# Altium PCB pcb1.PcbDoc
Units mm, origin at the board's own origin, x right, y up, seen from the top; angles counter-clockwise.
Board outline 100 x 100 mm, 2 copper layers (Top Layer, Bottom Layer); 18 components, 17 nets, 56 pads, 2 vias.
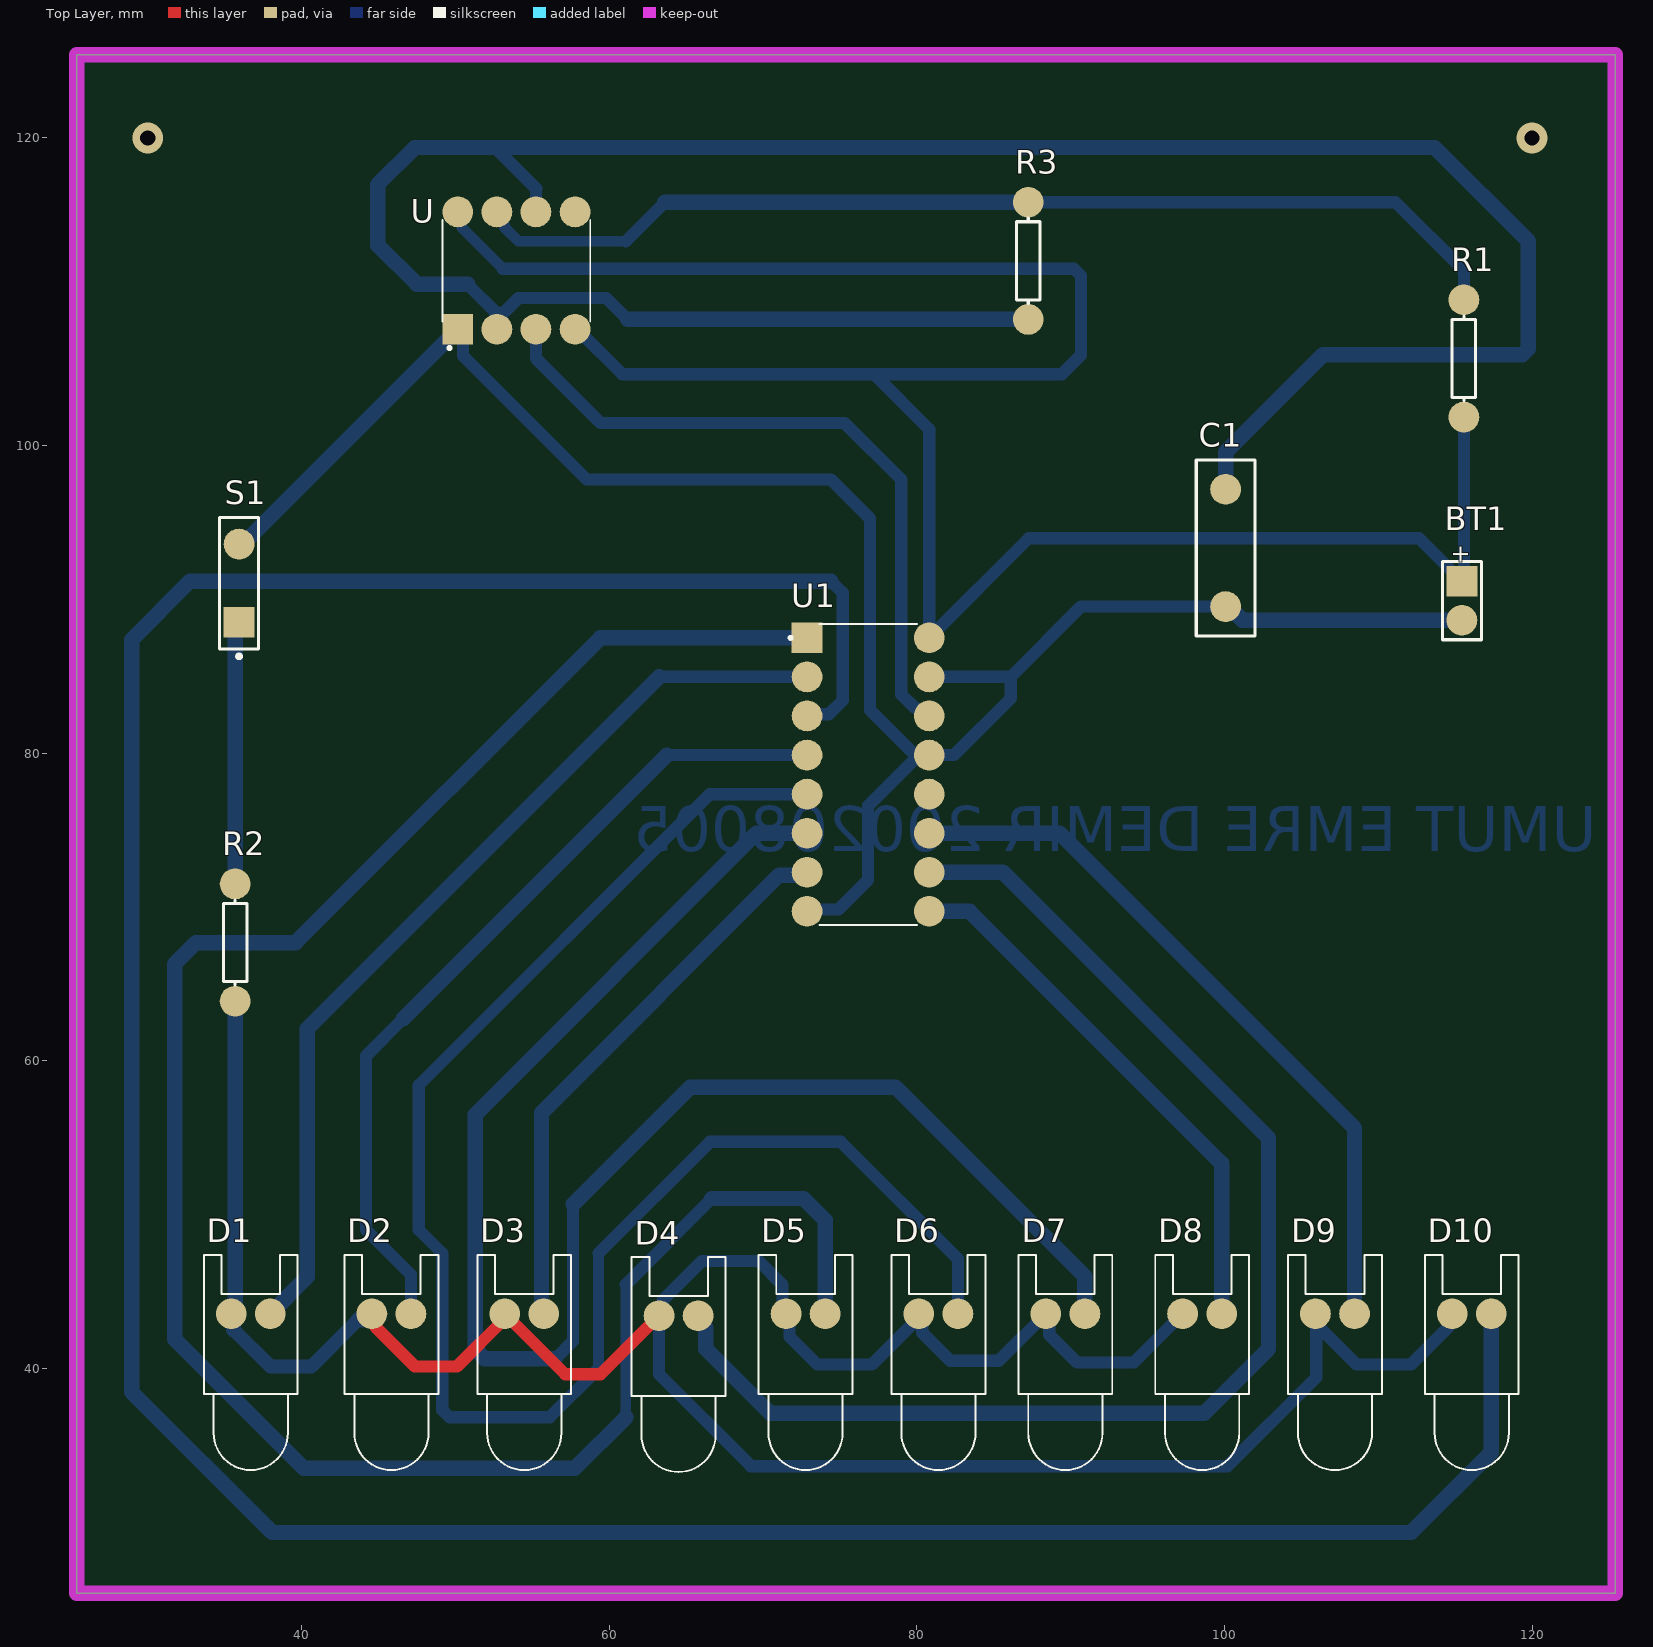
[diagram p0: Top Layer view]
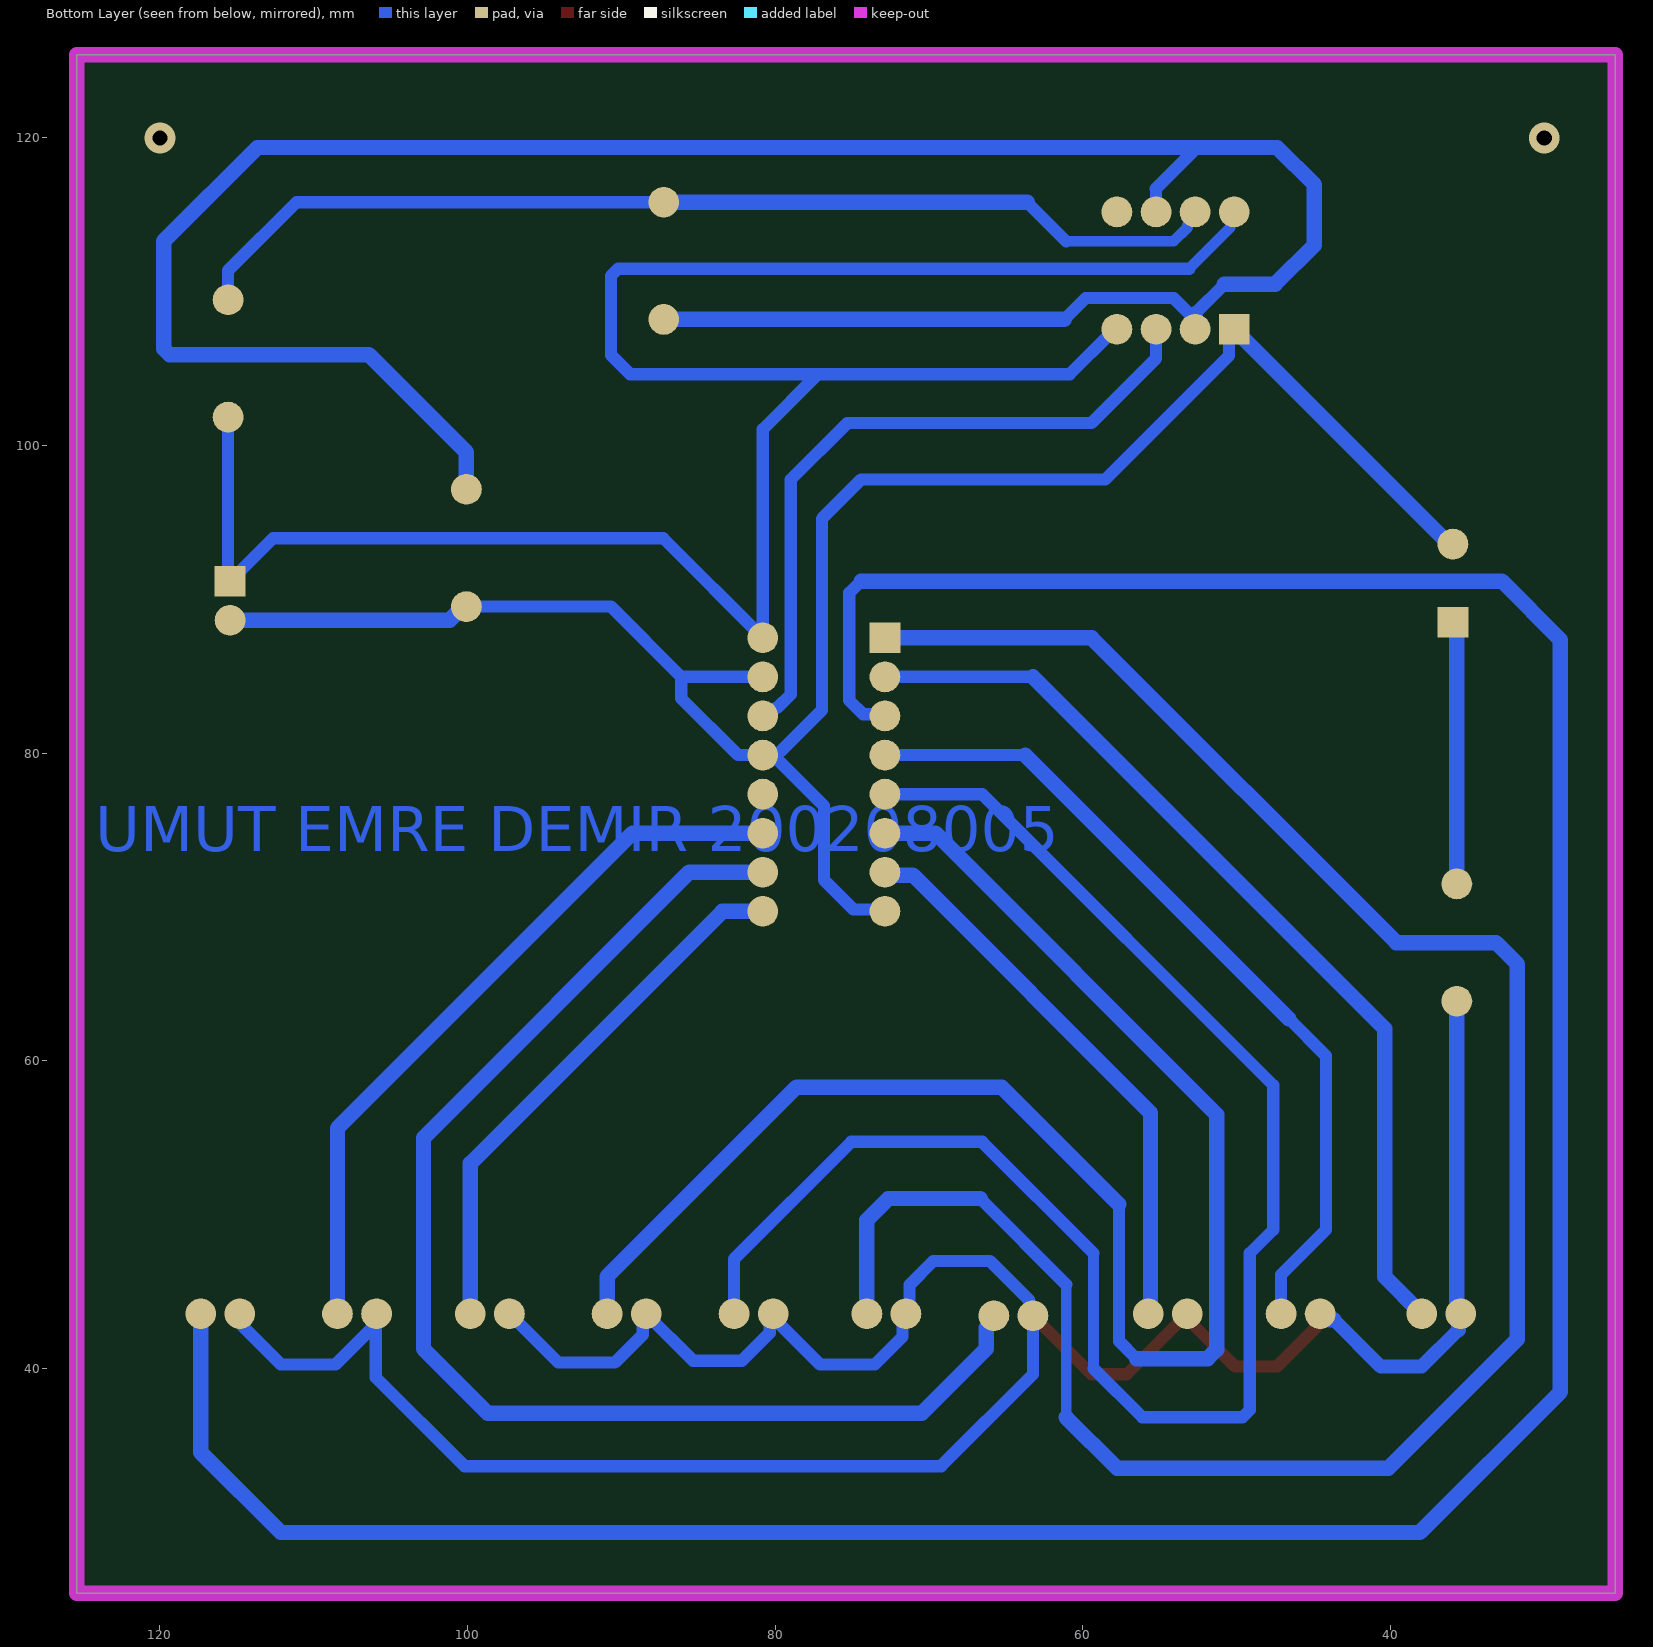
[diagram p1: Bottom Layer view, seen from below]

## Layer stack, top to bottom
Top Solder: solder mask 0.0102, Solder Resist, Dk 3.5
Top Layer: signal copper 0.0356
Dielectric 1: dielectric 0.32, FR-4, Dk 4.8
Bottom Layer: signal copper 0.0356
Bottom Solder: solder mask 0.0102, Solder Resist, Dk 3.5

## Board outline
25.4,25.4 25.4,125.4 125.4,125.4 125.4,25.4

## Design rules (kind name [scope] priority, off if disabled: settings)
Clearance [All] p1: gap=0.254 ignorepadtopadclearanceinfootprint=FALSE except(0: Arc-Hole Track-Hole SMDPad-Hole THPad-Hole Via-Hole Fill-Hole Poly-Hole Region-Hole Text-Hole)
PolygonConnect [All] p1: connectstyle=Relief reliefconductorwidth=0.254 reliefentries=4 polygonreliefangle="90 Angle" airgapwidth=0.254
RoutingVias [All] p1: holewidth=0.711 width=1.27 viastyle="Through Hole" minholewidth=0.711 minwidth=1.27 maxholewidth=0.711 maxwidth=1.27
SolderMaskExpansion [All] p1: expansion=0.102 istentingtop=FALSE
Width [All] p1: maxlimit=1 minlimit=0.5 preferedwidth=0.8 minimp=50.000000 maximp=50.000000 favimp=50.000000
30 further rules are at their usual default settings.

## Classes and differential pairs
component class kesinSheet1: BT1 C1 D1 D2 D6 D7 D8 D9 D10 R1 R2 R3 S1 U U1

## Components (designator, comment, footprint, x,y, rotation, side; value= is the part's Value field where it differs from the comment)
BT1 "Battery" BAT-2 115.443,89.916 r270 top
C1 "Cap" RAD-0.3 100.076,93.345 r90 top value=10nF
D1 "LED0" LED-0 36.703,43.561 r0 top
D2 "LED0" LED-0 45.847,43.561 r0 top
D3 "LED0" LED-0 54.483,43.561 r0 top
D4 "LED0" LED-0 64.516,43.434 r0 top
D5 "LED0" LED-0 72.771,43.561 r0 top
D6 "LED0" LED-0 81.407,43.561 r0 top
D7 "LED0" LED-0 89.662,43.561 r0 top
D8 "LED0" LED-0 98.552,43.561 r0 top
D9 "LED0" LED-0 107.188,43.561 r0 top
D10 "LED0" LED-0 116.078,43.561 r0 top
R1 "Res1" AXIAL-0.3 115.57,105.664 r270 top value=1K
R2 "Res1" AXIAL-0.3 35.687,67.691 r270 top value=1K
R3 "Res1" AXIAL-0.3 87.249,112.014 r90 top value=10K
S1 "SW-SPST" SPST-2 35.941,91.059 r90 top
U "LM555CN" DIP762W46P254L960H508Q8 53.975,111.379 r90 top
U1 "CD4017BE" DIP794W45P254L1969H508Q16 76.835,78.613 r0 top

## Footprints (in the part's own frame and the unit in brackets; to place one, negate y for a bottom-side part, rotate by r counter-clockwise, add the part's x,y. Pads: shape width x height; smd on the part's side, far side on the other; paste and mask are expansions set on the pad)
AXIAL-0.3 [mm] "Axial Device, Thru-Hole; 2 Leads; 0.3 in Pin Spacing"
  round 2 all layers, no hole: 1(-3.81,0) 2(3.81,0)
  silkscreen extent -2.77,-0.76 2.77,0.76
BAT-2 [mm] "Battery; 2 Leads"
  rect 2x2 all layers, no hole: 1(-1.27,0)
  round 2 all layers, no hole: 2(1.27,0)
  silkscreen extent -2.54,-1.27 2.54,1.27
DIP762W46P254L960H508Q8 [mm]
  rect 2x2 all layers, no hole: 1(-3.81,3.81)
  round 2 all layers, no hole: 2(-3.81,1.27) 3(-3.81,-1.27) 4(-3.81,-3.81) 5(3.81,-3.81) 6(3.81,-1.27) 7(3.81,1.27) 8(3.81,3.81)
  silkscreen extent -5.13,-4.8 3.3,4.8
DIP794W45P254L1969H508Q16 [mm]
  rect 2x2 / inner round 1.13 / far side rect 2x2 all layers, no hole: 1(-3.97,8.89)
  round 2 all layers, no hole: 2(-3.97,6.35) 3(-3.97,3.81) 4(-3.97,1.27) 5(-3.97,-1.27) 6(-3.97,-3.81) 7(-3.97,-6.35) 8(-3.97,-8.89) 9(3.97,-8.89) 10(3.97,-6.35) 11(3.97,-3.81) 12(3.97,-1.27) 13(3.97,1.27) 14(3.97,3.81) 15(3.97,6.35) 16(3.97,8.89)
  silkscreen extent -5.13,-9.77 3.18,9.77, body extent -3.84,-9.65 3.85,9.65, height 5.08
LED-0 [mm] "LED; 2 Leads"
  round 2 all layers, no hole: 1(1.27,0) 2(-1.27,0)
  silkscreen extent -3.05,-10.16 3.05,3.81
RAD-0.3 [mm] "Radial Cap, Thru-Hole; 2 Leads; 0.3 in Pin Spacing"
  round 2 all layers, no hole: 1(-3.81,0) 2(3.81,0)
  silkscreen extent -5.71,-1.91 5.71,1.91
SPST-2 [mm] "Switch; 2 Leads"
  rect 2x2 all layers, no hole: 1(-2.54,0)
  round 2 all layers, no hole: 2(2.54,0)
  silkscreen extent -4.89,-1.27 4.28,1.27

## Part data
BT1: "Multicell Battery", LatestRevisionDate=17-Jul-2002, LatestRevisionNote="Re-released for DXP Platform.", PackageDescription="Battery; 2 Leads", PackageReference=BAT-2, Published=24-Mar-1999, Publisher="Altium Limited"
C1: "Capacitor", LatestRevisionDate=17-Jul-2002, LatestRevisionNote="Re-released for DXP Platform.", PackageDescription="Radial Cap, Thru-Hole; 2 Leads; 0.3 in Pin Spacing", PackageReference=RAD-0.3, Published=8-Jun-2000, Publisher="Altium Limited"
D1 D2 D3 D4 D5 D6 D7 D8 D9 D10: "Typical INFRARED GaAs LED", LatestRevisionDate=08-Jul-2005, LatestRevisionNote="Mech Layer 1 removed.", PackageDescription="LED; 2 Leads", PackageReference=LED-0, Published=8-Jun-2000, Publisher="Altium Limited"
R1 R2 R3: "Resistor", LatestRevisionDate=17-Jul-2002, LatestRevisionNote="Re-released for DXP Platform.", PackageDescription="Axial Device, Thru-Hole; 2 Leads; 0.3 in Pin Spacing", PackageReference=AXIAL-0.3, Published=8-Jun-2000, Publisher="Altium Limited"
S1: "Single-Pole, Single-Throw Switch", LatestRevisionDate=17-Jul-2002, LatestRevisionNote="Re-released for DXP Platform.", PackageDescription="Switch; 2 Leads", PackageReference=SPST-2, Published=24-Mar-1999, Publisher="Altium Limited"
U: "555 Type, Timer/Oscillator (Single) IC 100kHz 8-PDIP", Package="DIP-8 Intersil", Availability=Unavailable, MF="Texas Instruments", MP=LM555CN, Price=None, SnapEDA_Link=https://www.snapeda.com/parts/LM555CN/Texas%20Instruments/view-part/2617191/?ref=snap
U1: "CMOS Decade Counter with 10 Decoded Outputs", Package="PDIP-16 Texas Instruments", Availability="In Stock", Check_prices=https://www.snapeda.com/parts/CD4017BE/Texas+Instruments/view-part/?ref=eda, MF="Texas Instruments", MP=CD4017BE, Price=None, Purchase-URL=https://pricing.snapeda.com/search/part/CD4017BE/?ref=eda, SnapEDA_Link=https://www.snapeda.com/parts/CD4017BE/Texas+Instruments/view-part/?ref=snap

## Via types
v1: diameter 2, hole 1, Top Layer to Bottom Layer, 2 vias

## Nets (pads, with @x,y where several pads share a name; then routed paths per layer and width w, separated by ;. In a path a pad name is that pad's centre, name@x,y a point inside that pad or via, vN(x,y) a via of type N, cw(c..) or ccw(c..) an arc to the next point about the centre after c; other vN are vias at no path point)
GND: R2.1 S1.1 | length 17.1
  Bottom Layer w0.5: S1.1@35.687,88.265 S1.1
  Bottom Layer w1: R2.1 S1.1@35.687,88.265
NetBT1_1: BT1.1 R1.2 U1.16 U.4 U.8 | length 150.1
  Bottom Layer w0.7: U.8 50.414,114.94 50.414,114.178 53.086,111.506
  Bottom Layer w0.8: 53.086,111.506 90.209,111.506 90.678,111.037 90.678,105.879 89.447,104.648 77.216,104.648 ; U.4@57.93,107.537 58.109,107.359 58.14,107.359 60.851,104.648 77.216,104.648 ; R1.2 115.57,91.313 BT1.1 112.649,93.98 87.282,93.98 U1.16 80.805,101.059 77.216,104.648
NetBT1_2: BT1.2 C1.1 S1.2 U1.8 U1.13 U1.15 U.1 | length 129.1
  Bottom Layer w0.8: S1.2 S1.2@36.195,93.599 ; U.1 50.499,107.235 50.499,105.838 58.547,97.79 74.422,97.79 76.962,95.25 76.962,82.804 79.653,80.113 ; U1.8 72.986,69.844 74.924,69.844 76.835,71.755 76.835,76.581 79.907,79.653 80.575,79.653 U1.13 82.423,79.883 86.106,83.566 86.106,84.963 ; U1.15 86.106,84.963 ; C1.1 90.678,89.535 86.106,84.963
  Bottom Layer w1: S1.2@36.195,93.599 U.1 ; C1.1 100.273,89.535 101.162,88.646 BT1.2
NetC1_2: C1.2 R3.1 U.2 U.6 | length 165.7
  Bottom Layer w0.8: 50.8,110.49 52.705,108.585 ; 52.578,119.38 55.255,116.703 55.245,116.694 U.6 ; U.2@52.705,108.204 54.102,109.601 59.817,109.601 61.214,108.204
  Bottom Layer w1: 50.8,110.49 47.498,110.49 44.958,113.03 44.958,116.967 47.371,119.38 52.578,119.38 113.665,119.38 119.761,113.284 119.761,106.299 119.38,105.918 106.426,105.918 100.076,99.568 C1.2 ; U.2 52.705,108.585 ; 61.214,108.204 80.772,108.204 R3.1
NetD1_1: D1.1 U1.2 | length 61.5
  Bottom Layer w0.8: 63.246,84.963 U1.2
  Bottom Layer w1: D1.1 40.386,45.974 40.386,62.103 63.246,84.963
NetD1_2: D1.2 D2.2 D3.2 D4.2 D5.2 D6.2 D7.2 D8.2 D9.2 D10.2 R2.2 | length 174.1
  Top Layer w0.8: D2.2 44.807,43.331 44.807,42.696 47.371,40.132 50.109,40.132 53.213,43.236 D3.2 57.15,39.624 59.436,39.624 D4.2
  Bottom Layer w0.5: D2.2 D2.2@44.831,43.561
  Bottom Layer w0.8: D8.2 94.107,40.386 90.424,40.386 88.622,42.188 88.622,43.331 D7.2 85.344,40.513 82.169,40.513 80.367,42.315 80.367,43.331 D6.2 80.137,43.307 77.089,40.259 73.533,40.259 71.731,42.061 71.731,43.331 71.271,43.791 71.271,45.442 69.723,46.99 66.04,46.99 63.476,44.426 63.476,43.664 D4.2 63.246,39.624 69.215,33.655 100.203,33.655 105.968,39.42 105.968,43.053 105.968,43.511 D9.2 ; D9.2@105.918,42.926 108.585,40.259 112.141,40.259 114.578,42.696 114.578,43.331 D10.2
  Bottom Layer w0.9: 35.582,42.523 37.973,40.132 40.64,40.132 D2.2@43.68,43.172
  Bottom Layer w1: 35.582,42.523 35.582,43.412 D1.2 35.582,43.71 35.582,44.26 35.687,44.365 R2.2 ; D2.2@43.68,43.172 43.977,43.172 44.366,43.561 D2.2
NetD2_1: D2.1 U1.4 | length 54.7
  Bottom Layer w0.8: 46.609,62.738 44.196,60.325 44.196,49.022 47.117,46.101 D2.1 ; 63.754,79.883 U1.4
  Bottom Layer w1: 46.609,62.738 63.754,79.883
NetD3_1: D3.1 U1.7 | length 36.9
  Bottom Layer w1: D3.1 55.604,43.71 55.604,56.62 71.056,72.072 72.674,72.072 U1.7
NetD4_1: D4.1 U1.10 | length 85.4
  Bottom Layer w1: D4.1 65.786,43.163 66.286,42.663 66.286,41.283 70.485,37.084 98.679,37.084 102.87,41.275 102.87,54.991 85.598,72.263 U1.10
NetD5_1: D5.1 U1.1 | length 139
  Bottom Layer w0.7: 61.087,36.83 61.087,45.466
  Bottom Layer w0.8: 61.087,45.466 66.675,51.054
  Bottom Layer w1: 61.087,36.83 57.785,33.528 40.132,33.528 31.75,41.91 31.75,66.294 33.147,67.691 39.624,67.691 59.436,87.503 U1.1 ; 66.675,51.054 72.644,51.054 74.041,49.657 D5.1
NetD6_1: D6.1 U1.5 | length 107.1
  Bottom Layer w0.7: 59.309,40.005 59.309,47.498
  Bottom Layer w0.8: 59.309,40.005 56.134,36.83 49.618,36.83 49.149,37.299 49.149,47.498 47.625,49.022 47.625,58.42 66.548,77.343 U1.5 ; 59.309,47.498 66.548,54.737 75.057,54.737 82.677,47.117 D6.1
NetD7_1: D7.1 U1.6 | length 104.3
  Bottom Layer w0.8: 56.515,40.64 57.658,41.783 57.658,50.673
  Bottom Layer w1: 56.515,40.64 51.894,40.64 51.308,41.226 51.308,56.515 69.596,74.803 U1.6 ; 57.658,50.673 65.278,58.293 78.613,58.293 90.932,45.974 D7.1
NetD8_1: D8.1 U1.9 | length 35.6
  Bottom Layer w1: U1.9 83.439,69.723 99.822,53.34 D8.1
NetD9_1: D9.1 U1.11 | length 47.7
  Bottom Layer w1: U1.11 89.281,74.803 108.458,55.626 D9.1
NetD10_1: D10.1 U1.3 | length 210.1
  Bottom Layer w0.8: U1.3 72.969,82.527 74.272,82.527 75.184,83.439 75.184,90.424 74.422,91.186
  Bottom Layer w1: 74.422,91.186 32.766,91.186 28.956,87.376 28.956,38.481 38.1,29.337 112.141,29.337 117.348,34.544 D10.1
NetR1_1: R1.1 R3.2 U.7 | length 68.7
  Bottom Layer w0.7: U.7 52.705,114.837 53.201,114.342 53.201,114.185 54.102,113.284 61.087,113.284
  Bottom Layer w0.8: 61.087,113.284 63.627,115.824 ; R3.2 111.125,115.824 115.57,111.379 R1.1
  Bottom Layer w1: 63.627,115.824 83.947,115.824 R3.2
NetU1_14: U1.14 U.3 | length 45.3
  Bottom Layer w0.8: U.3 55.245,105.664 59.436,101.473 75.311,101.473 78.994,97.79 78.994,83.82 79.842,82.972 79.932,82.972 80.48,82.423 U1.14
pads on no net: U1.12 U.5
copper on no net:
  other v1: 30,120 120,120

## Keep-outs
Keep-Out Layer:
  lines w0.254: 123.952,25.4 124.46,25.4
  lines w1: 25.4,25.4 125.4,25.4 125.4,125.4 25.4,125.4 25.4,25.4

## Other copper
Bottom Layer:
  text "UMUT EMRE DEMIR 200208005" at 124.206,72.644 h5

## Text inside footprints (layer, text, board x,y; h text height)
BT1: Top Overlay "+" at 114.866,93.586 h1.15 r270